# Altium PCB board.PcbDoc
Units mm, origin at the board's own origin, x right, y up, seen from the top; angles counter-clockwise.
Board outline 61 x 96 mm, 2 copper layers (Top Layer, Bottom Layer); 22 components, 98 nets, 207 pads, 43 vias.
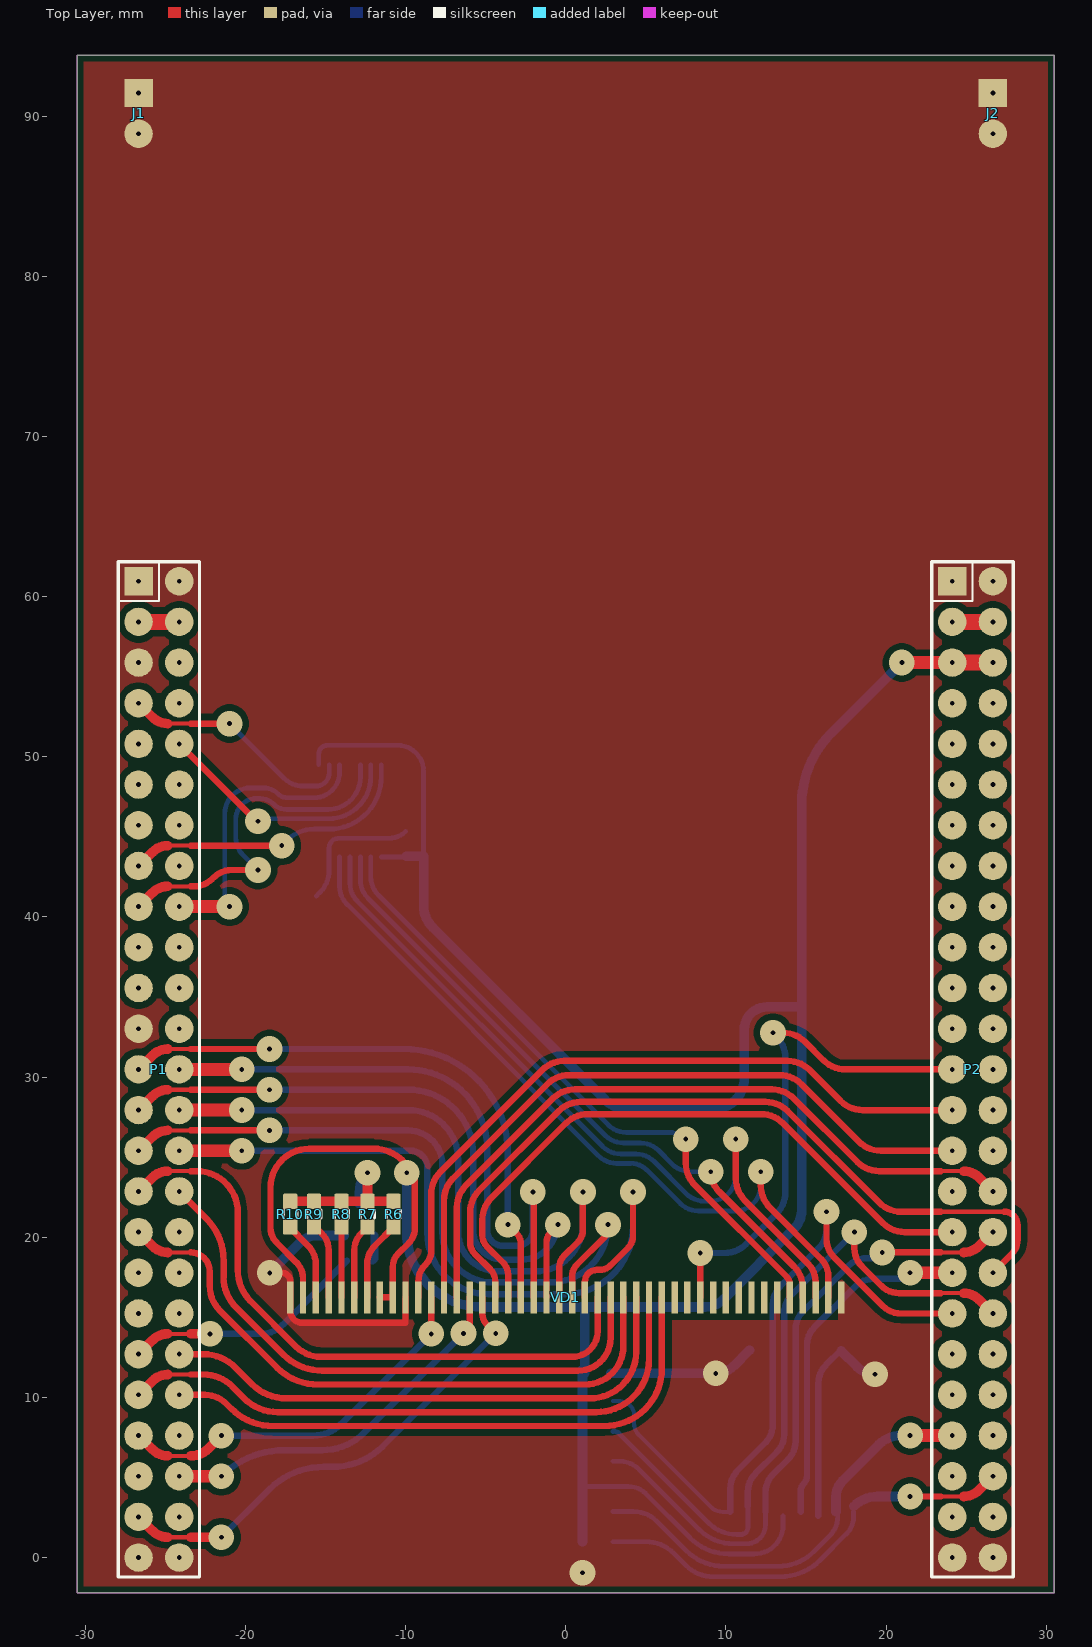
[diagram p0: Top Layer view]
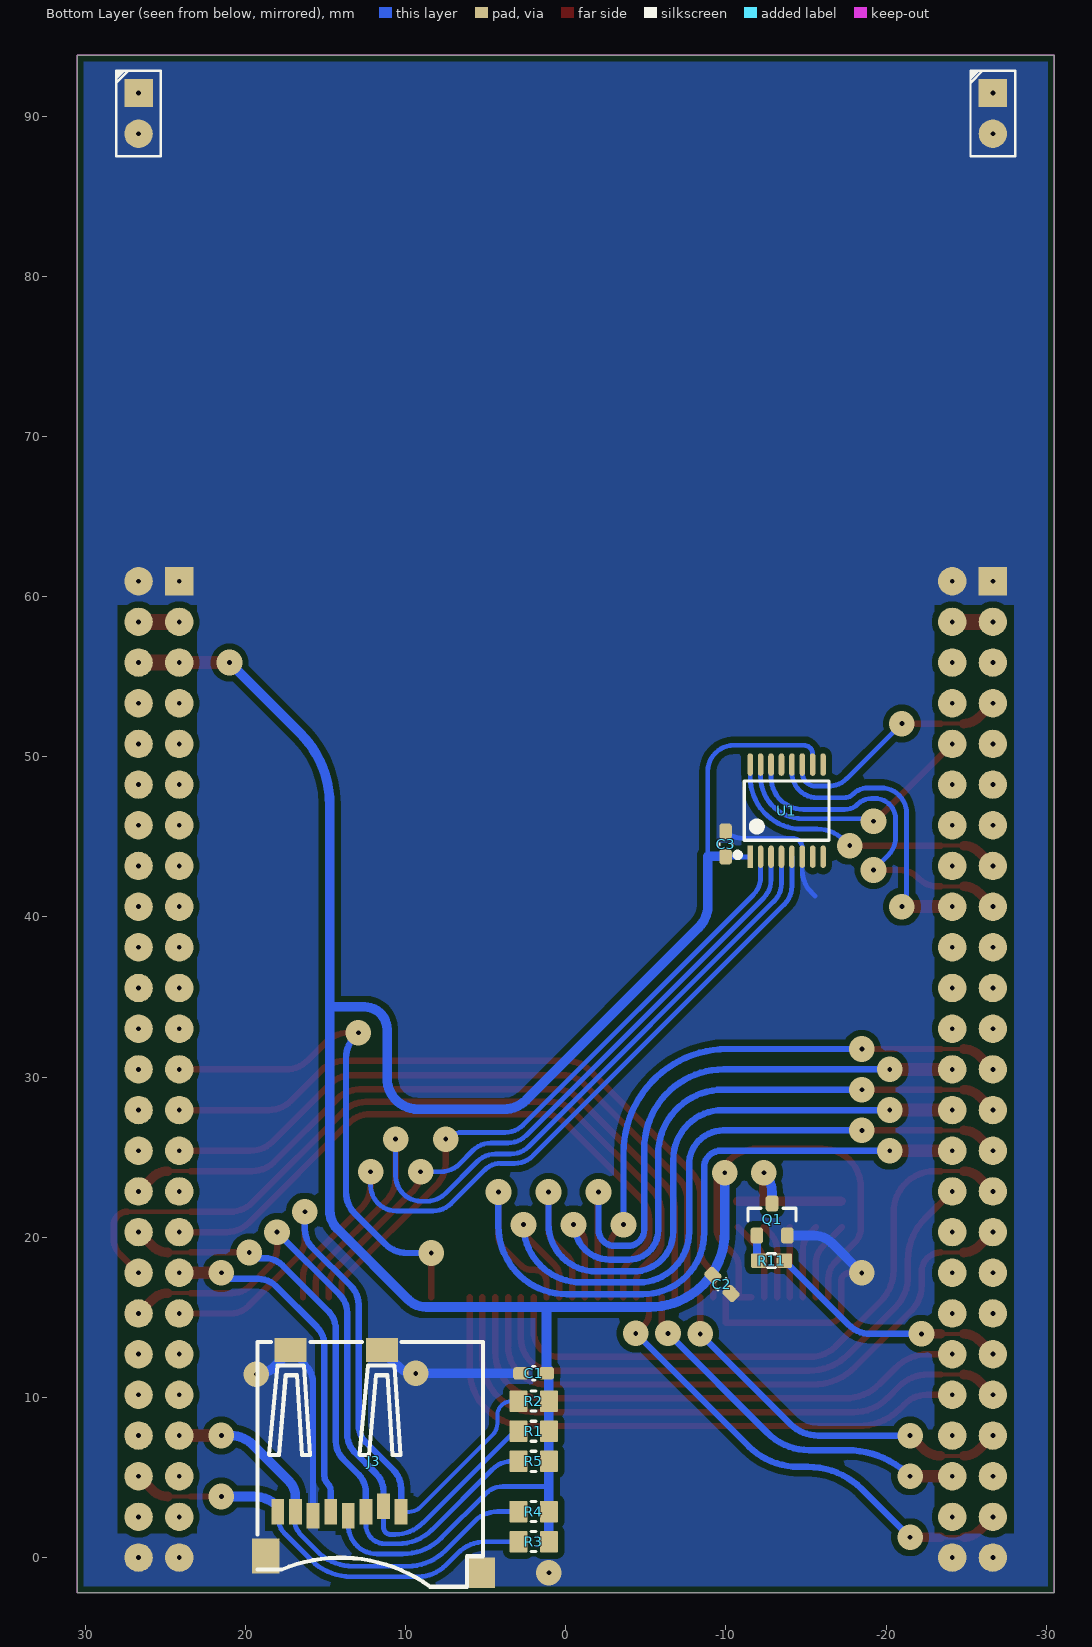
[diagram p1: Bottom Layer view, seen from below]
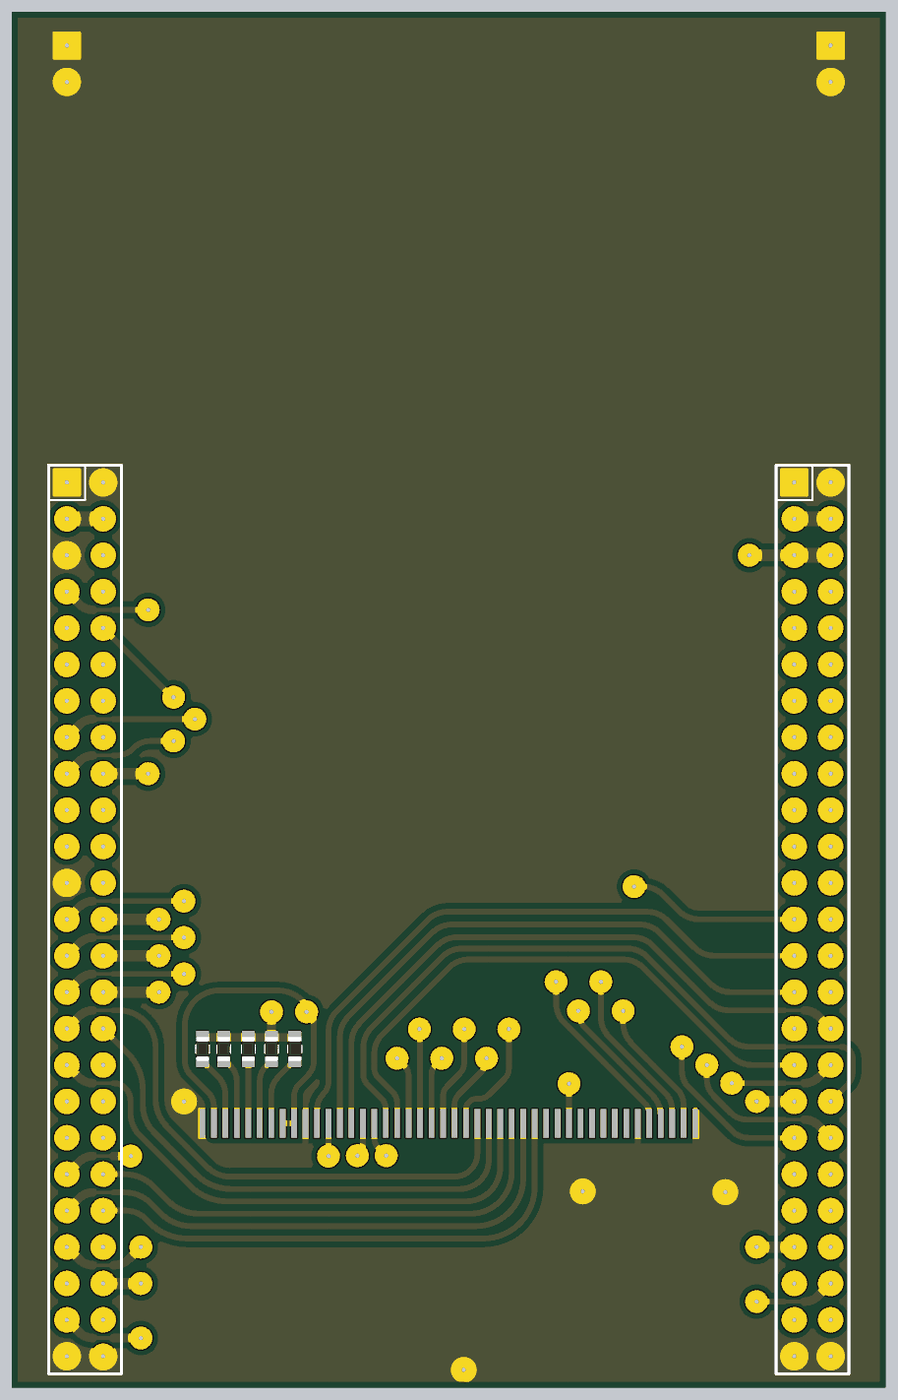
[diagram p2: 3D render of the assembled board from above, using the file's embedded part models]
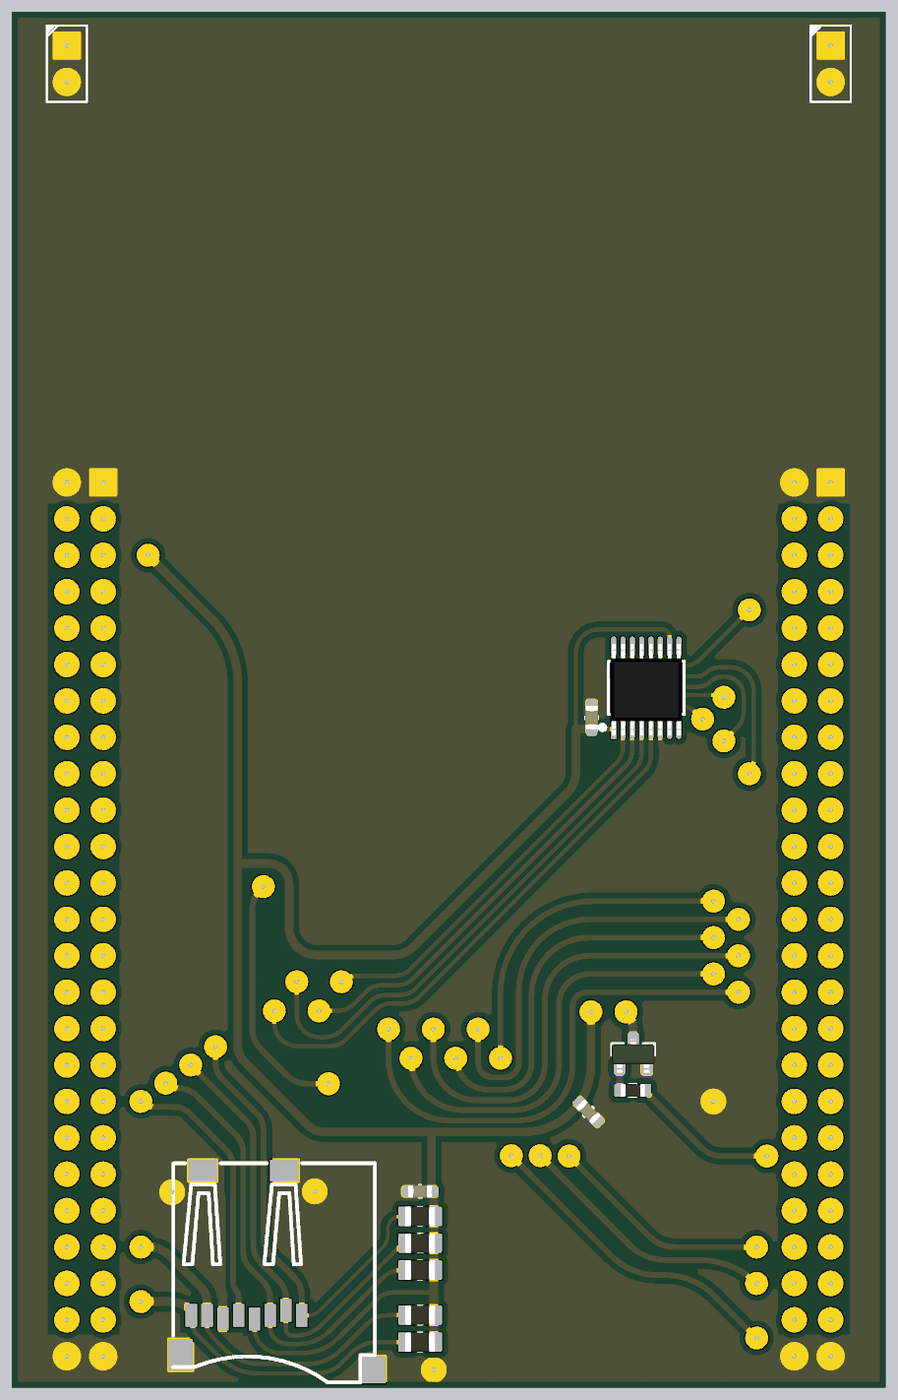
[diagram p3: 3D render of the assembled board from below, using the file's embedded part models]

## Layer stack, top to bottom
Top Solder: solder mask 0.0102, Solder Resist, Dk 3.5
Top Layer: signal copper 0.0356
Dielectric 1: dielectric 0.32, FR-4, Dk 4.8
Bottom Layer: signal copper 0.0356
Bottom Solder: solder mask 0.0102, Solder Resist, Dk 3.5

## Board outline
-30.5,-2.2 30.5,-2.2 30.5,93.8 -30.5,93.8

## Design rules (kind name [scope] priority, off if disabled: settings)
Clearance [All] p1: gap=0.254 ignorepadtopadclearanceinfootprint=FALSE except(0.4: Arc-Fill Arc-Poly Arc-Region Track-Fill Track-Poly Track-Region SMDPad-Fill SMDPad-Poly SMDPad-Region THPad-Fill THPad-Poly THPad-Region Via-Fill Via-Poly Via-Region Fill-Fill Fill-Poly Fill-Region Poly-Poly Poly-Region Region-Region)
PolygonConnect [All] p1: connectstyle=Direct reliefconductorwidth=0.254 reliefentries=4 polygonreliefangle="90 Angle" airgapwidth=0.254
RoutingVias [All] p1: holewidth=0.711 width=1.6 viastyle="Through Hole" minholewidth=0.2 minwidth=1.6 maxholewidth=0.711 maxwidth=2
SolderMaskExpansion [All] p1: expansion=0.102 istentingtop=FALSE
SupplyNets "Schematic Supply Nets_4" [InNet('VDD_2')] p1: voltage=0.000
SupplyNets "Schematic Supply Nets_3" [InNet('GND')] p2: voltage=0.000
SupplyNets "Schematic Supply Nets_2" [InNet('VDD')] p3: voltage=0.000
SupplyNets "Schematic Supply Nets_1" [InNet('5V')] p4: voltage=0.000
SupplyNets "Schematic Supply Nets" [InNet('3V')] p5: voltage=0.000
Width [All] p1: maxlimit=5 minlimit=0.2 preferedwidth=0.3
30 further rules are at their usual default settings.

## Components (designator, comment, footprint, x,y, rotation, side; value= is the part's Value field where it differs from the comment)
C1 "1u" C0603 2,11.5 r180 bottom
C2 "1u" C0603 -9.75,17.057 r45 bottom
C3 "1u" C0603 -9.982,44.548 r270 bottom
J1 "Header 2" HDR_1X2 -26.67,90.17 r180 top
J2 "Header 2" HDR_1X2 26.67,90.17 r180 top
J3 "TF-001B" TF-SMD_TF-001B 12,6 r90 bottom
P1 "Header 25X2" HDR_2X25 -25.4,30.48 r270 top
P2 "Header 25X2" HDR_2X25 25.4,30.48 r270 top
Q1 "2N7002" SOT-23 -12.883,21.107 r270 bottom
R1 "62k" R0805 2,7.887 r0 bottom
R2 "62k" R0805 2,9.762 r0 bottom
R3 "62k" R0805 2,0.992 r0 bottom
R4 "62k" R0805 2,2.867 r0 bottom
R5 "62k" R0805 2,6.012 r0 bottom
R6 "22" R0603 -10.75,21.438 r270 top
R7 "22" R0603 -12.375,21.438 r270 top
R8 "22" R0603 -14,21.438 r270 top
R9 "22" R0603 -15.716,21.438 r270 top
R10 "22" R0603 -17.196,21.438 r270 top
R11 "100" R0603 -12.852,18.542 r0 bottom
U1 "XPT2046" TSSOP-16 -13.795,46.633 r90 bottom
VD1 "R61509" TFT_3.2inch 0,4.5 r0 top

## Footprints (in the part's own frame and the unit in brackets; to place one, negate y for a bottom-side part, rotate by r counter-clockwise, add the part's x,y. Pads: shape width x height; smd on the part's side, far side on the other; paste and mask are expansions set on the pad)
C0603 [mil] "Chip Capacitor"
  rrect50% 38x31 smd mask+1.97: 1(-31.5,0) 2(31.5,0)
  silkscreen extent -3,-17 3,17, body extent -33,-18 33,18, height 35
HDR_1X2 [mil]
  rect 70x70 hole 11.81: 1(0,-50)
  round 70 hole 11.81: 2(0,50)
HDR_2X25 [mil]
  rect 70x70 hole 11.81: 1(-1200,-50)
  round 70 hole 11.81: 2(-1200,50) 3(-1100,-50) 4(-1100,50) 5(-1000,-50) 6(-1000,50) 7(-900,-50) 8(-900,50) 9(-800,-50) 10(-800,50) 11(-700,-50) 12(-700,50) 13(-600,-50) 14(-600,50) 15(-500,-50) 16(-500,50) 17(-400,-50) 18(-400,50) 19(-300,-50) 20(-300,50) 21(-200,-50) 22(-200,50) 23(-100,-50) 24(-100,50) 25(0,-50) 26(0,50) 27(100,-50) 28(100,50) 29(200,-50) 30(200,50) 31(300,-50) 32(300,50) 33(400,-50) 34(400,50) 35(500,-50) 36(500,50) 37(600,-50) 38(600,50) 39(700,-50) 40(700,50) 41(800,-50) 42(800,50) 43(900,-50) 44(900,50) 45(1000,-50) 46(1000,50) 47(1100,-50) 48(1100,50) 49(1200,-50) 50(1200,50)
  silkscreen extent -1248,-101 1248,100
R0603 [mil] "Chip Resistor; Body 1.6 x 0.8 mm (LxW typ)"
  rrect20% 38x35.43 smd mask+1.97: 1(-31.5,0) 2(31.5,0)
  silkscreen extent -10,-17 10,17, body extent -33,-18 33,18, height 22
R0805 [mil] "Chip Resistor; Body 1.6 x 0.8 mm (LxW typ)"
  rrect15% 45x53.15 smd: 1(-37.5,0) 2(37.5,0)
  silkscreen extent -6,-25 6,25, body extent -41,-27 41,27, height 24
SOT-23 [mm]
  rrect50% 1x0.8 smd mask+0.05: 1(1,-0.95) 2(1,0.95) 3(-1,0)
  silkscreen extent -0.7,-1.5 0.1,1.5, body extent -1.27,-1.5 1.33,1.5, height 1.1
TF-SMD_TF-001B [mm]
  rect 1.6x0.8 smd: 1(-3.145,-1.726) 2(-2.8,-0.625) 3(-3.15,0.475) 4(-3.4,1.575) 5(-3.15,2.675) 6(-3.4,3.775) 7(-3.15,4.875) 8(-3.15,5.975)
  rect 2.2x1.7 smd: 9(-5.9,6.725)
  rect 1.9x1.7 smd: 10(-6.95,-6.725)
  rect 1.5x2 smd: 11(6.95,5.175) 12(6.95,-0.525)
  silkscreen extent -7.82,-6.84 7.47,7.26
TFT_3.2inch [mm]
  rect 0.4x2 smd: 1(17.2,11.75) 2(16.4,11.75) 3(15.6,11.75) 4(14.8,11.75) 5(14,11.75) 6(13.2,11.75) 7(12.4,11.75) 8(11.6,11.75) 9(10.8,11.75) 10(10,11.75) 11(9.2,11.75) 12(8.4,11.75) 13(7.6,11.75) 14(6.8,11.75) 15(6,11.75) 16(5.2,11.75) 17(4.4,11.75) 18(3.6,11.75) 19(2.8,11.75) 20(2,11.75) 21(1.2,11.75) 22(0.4,11.75) 23(-0.4,11.75) 24(-1.2,11.75) 25(-2,11.75) 26(-2.8,11.75) 27(-3.6,11.75) 28(-4.4,11.75) 29(-5.2,11.75) 30(-6,11.75) 31(-6.8,11.75) 32(-7.6,11.75) 33(-8.4,11.75) 34(-9.2,11.75) 35(-10,11.75) 36(-10.8,11.75) 37(-11.6,11.75) 38(-12.4,11.75) 39(-13.2,11.75) 40(-14,11.75) 41(-14.8,11.75) 42(-15.6,11.75) 43(-16.4,11.75) 44(-17.2,11.75)
  body extent -24,-1.5 24,81, height 5.8
TSSOP-16 [mm]
  rect 1.4x0.35 smd: 1(-2.875,2.275)
  oval 1.4x0.35 smd: 2(-2.875,1.625) 3(-2.875,0.975) 4(-2.875,0.325) 5(-2.875,-0.325) 6(-2.875,-0.975) 7(-2.875,-1.625) 8(-2.875,-2.275) 9(2.875,-2.275) 10(2.875,-1.625) 11(2.875,-0.975) 12(2.875,-0.325) 13(2.875,0.325) 14(2.875,0.975) 15(2.875,1.625) 16(2.875,2.275)
  silkscreen extent -2.89,-2.65 1.85,3.18, body extent -3.34,-2.5 3.06,2.5, height 1.21

## Part data
C1 C2 C3: library part Cap
J3: JLCPCB Part Class="Extended Part", LCSC Part Name="自弹式 MicroSD卡(TF卡) 卡座", Manufacturer=SOFNG(硕方), Operating Temperature=-35℃~+85℃, Add into BOM=yes, Additional Card Detection Pins=带检测功能, Card Connection Mode=Self-bouncing, Card Type="MicroSD card (TF card)", Connector Type="Card Slot", Convert to PCB=yes, Datasheet=https://atta.szlcsc.com/upload/public/pdf/source/20200911/C125617_63CFE4E7470796235D874E54AE54675D.pdf, Device=TF-001B, Height Above Board=1.85mm, Manufacturer Part=TF-001B, Supplier=LCSC, Supplier Footprint=SMD, Supplier Part=C125617, Symbol=TF-001B
P1 P2: "Header, 25-Pin, Dual row", LatestRevisionDate=17-Jul-2002, LatestRevisionNote="Re-released for DXP Platform.", Publisher="Altium Limited"
R1 R2 R3 R4 R5 R6 R7 R8 R9 R10 R11: library part RES_0402_1K5-1%
U1: library part U?
VD1: library part R61509_TFT

## Via types
v1: diameter 1.6, hole 0.3, Top Layer to Bottom Layer, 43 vias

## Nets (pads, with @x,y where several pads share a name; then routed paths per layer and width w, separated by ;. In a path a pad name is that pad's centre, name@x,y a point inside that pad or via, vN(x,y) a via of type N, cw(c..) or ccw(c..) an arc to the next point about the centre after c; other vN are vias at no path point)
3V: C1.2 C2.2 C3.2 J3.4 P2.5 P2.6 R1.1 R2.1 R3.1 R4.1 R5.1 U1.1 U1.10 VD1.36 VD1.37 VD1.43 | length 187.7
  Top Layer w0.4: VD1.43 -16.4,17.422 ccw(c-17.82,17.422) -16.816,18.427 -18.035,19.646 cw(c-17.083,20.597) -18.429,20.597 -18.429,23.114 cw(c-16.019,23.114) -16.019,25.524 -11.97,25.524 cw(c-11.97,22.984) -10.174,24.781 -9.422,24.028 -9.422,20.56 cw(c-10.734,20.56) -9.806,19.633 -10.456,18.982 ccw(c-9.626,18.152) -10.8,18.152 VD1.36 VD1.37
  Top Layer w0.8: v1(20.992,55.88) P2.5
  Top Layer w1: P2.5 P2.6
  Bottom Layer w0.3: U1.10@-15.417,49.498 -15.417,50.171 cw(c-14.876,50.171) -14.876,50.712 -10.495,50.712 cw(c-10.495,49.092) -8.874,49.092 -8.874,43.776 ; U1.1@-11.517,43.748 C3.2 C3.2@-9.954,43.776 ; 1.048,4.44 3.923,4.44 cw(c3.923,2.931) 4.99,3.998 7.759,1.228 ccw(c10.183,3.652) 10.183,0.224 11.777,0.224 ccw(c11.777,2.022) 13.575,2.022 J3.4
  Bottom Layer w0.6: C3.2@-9.954,43.776 -8.874,43.776 -8.874,40.723 ccw(c-6.919,40.723) -8.302,39.34 2.475,28.564 ccw(c3.858,29.947) 3.858,27.991 9.22,27.991 ccw(c9.22,29.921) 11.151,29.921 11.151,32.969 cw(c12.561,32.969) 12.561,34.38 14.732,34.38 ; v1(-9.93,24.028) -9.93,20.314 ccw(c-5.262,20.314) -5.262,15.646 1.2,15.646 ; R3.1 R4.1 1.048,4.44 R5.1 R1.1 R2.1 C1.2@1.048,11.728 ; C1.2 1.2,15.646 ; v1(20.992,55.88) 16.57,51.458 ccw(c21.006,47.021) 14.732,47.021 14.732,34.38 ; 1.2,15.646 8.71,15.646 ccw(c8.71,17.247) 9.841,16.115 14.263,20.537 ccw(c13.132,21.669) 14.732,21.669 14.732,34.38
5V: P2.3 P2.4 | length 2.5
  Top Layer w1: P2.3 P2.4
BOOT0: P2.21
D0: P1.46 VD1.30 | length 23.5
  Top Layer w0.4: v1(-6.384,13.995) -6,14.379 VD1.30
  Top Layer w0.8: P1.46@-24.13,5.077 v1(-21.5,5.077)
  Bottom Layer w0.4: v1(-21.5,5.077) cw(c-17.567,1.144) -17.567,6.706 -15.192,6.706 ccw(c-15.192,10.373) -12.6,7.779 v1(-6.384,13.995)
D1: P1.47 VD1.29 | length 30.2
  Top Layer w0.254: -24.841,1.27 -23.419,1.27
  Top Layer w0.4: VD1.29 -5.2,15.192 ccw(c-4.32,15.192) -4.942,14.57 v1(-4.367,13.995)
  Top Layer w0.6: P1.47 -25.795,1.665 ccw(c-24.841,2.619) -24.841,1.27 ; -23.419,1.27 v1(-21.5,1.27)
  Bottom Layer w0.4: v1(-21.5,1.27) -18.515,4.255 cw(c-15.112,0.851) -15.112,5.664 -14.552,5.664 ccw(c-14.552,10.14) -11.388,6.974 v1(-4.367,13.995)
D2: P2.36 VD1.28 | length 49.9
  Top Layer w0.254: 23.419,21.59 27.381,21.59
  Top Layer w0.4: VD1.28 -4.4,17.263 ccw(c-5.416,17.263) -4.698,17.982 -5.671,18.956 cw(c-4.953,19.674) -5.969,19.674 -5.969,21.542 cw(c-4.013,21.542) -5.396,22.925 -0.446,27.875 cw(c0.937,26.492) 0.937,28.448 12.474,28.448 cw(c12.474,26.492) 13.857,27.875 19.569,22.163 ccw(c20.952,23.546) 20.952,21.59 23.419,21.59 ; P2.36 27.842,18.952 ccw(c26.932,19.863) 28.219,19.863 28.219,20.752 ccw(c27.381,20.752) 27.381,21.59
D3: P2.33 VD1.27 | length 40.7
  Top Layer w0.4: VD1.27 -3.6,17.683 ccw(c-4.616,17.683) -3.898,18.401 -4.909,19.413 cw(c-4.191,20.131) -5.207,20.131 -5.207,21.085 cw(c-3.251,21.085) -4.634,22.468 0.011,27.113 cw(c1.394,25.73) 1.394,27.686 12.186,27.686 cw(c12.186,25.73) 13.569,27.113 19.79,20.893 ccw(c21.172,22.276) 19.791,20.892 ccw(c21.172,22.276) 21.172,20.32 P2.33
D4: P1.25 VD1.26 | length 36.5
  Top Layer w0.254: -24.841,31.75 -23.419,31.75
  Top Layer w0.4: -23.419,31.75 v1(-18.491,31.75) ; v1(-3.61,20.791) -3.098,20.278 cw(c-3.816,19.56) -2.8,19.56 VD1.26
  Top Layer w0.6: P1.25 -25.795,31.355 cw(c-24.841,30.401) -24.841,31.75
  Bottom Layer w0.4: v1(-18.491,31.75) -10.096,31.75 cw(c-10.096,25.264) -3.61,25.264 v1(-3.61,20.791)
D5: P1.26 VD1.25 | length 40.1
  Top Layer w0.4: v1(-2.048,22.823) cw(c-2.164,22.706) -2,22.706 VD1.25
  Top Layer w0.8: P1.26 v1(-20.23,30.48)
  Bottom Layer w0.4: v1(-20.23,30.48) -9.867,30.48 cw(c-9.867,25.516) -4.902,25.516 -4.902,20.472 ccw(c-3.886,20.472) -3.886,19.456 -3.064,19.456 ccw(c-3.064,20.472) -2.048,20.472 v1(-2.048,22.823)
D6: P1.27 VD1.24 | length 40.8
  Top Layer w0.254: -24.841,29.21 -23.419,29.21
  Top Layer w0.4: -23.419,29.21 v1(-18.491,29.21) ; VD1.24 -1.2,19.656 cw(c-0.184,19.656) -0.902,20.374 v1(-0.486,20.791)
  Top Layer w0.6: P1.27 -25.795,28.815 cw(c-24.841,27.861) -24.841,29.21
  Bottom Layer w0.4: v1(-18.491,29.21) -9.806,29.21 cw(c-9.806,25.177) -5.773,25.177 -5.773,20.433 ccw(c-3.941,20.433) -3.941,18.601 -2.742,18.601 ccw(c-2.742,20.791) -0.552,20.791 v1(-0.486,20.791)
D7: P1.28 VD1.23 | length 43.7
  Top Layer w0.4: VD1.23 -0.4,18.128 cw(c0.616,18.128) -0.102,18.846 0.778,19.727 ccw(c0.06,20.445) 1.076,20.445 v1(1.076,22.823)
  Top Layer w0.8: P1.28 v1(-20.23,27.94)
  Bottom Layer w0.4: v1(-20.23,27.94) -9.81,27.94 cw(c-9.81,24.843) -6.713,24.843 -6.713,20.352 ccw(c-4.225,20.352) -4.225,17.864 -1.902,17.864 ccw(c-1.902,20.842) 1.076,20.842 v1(1.076,22.823)
D8: P1.29 VD1.22 | length 44.4
  Top Layer w0.254: -24.841,26.67 -23.419,26.67
  Top Layer w0.4: -23.419,26.67 v1(-18.491,26.67) ; VD1.22 0.4,17.556 cw(c1.416,17.556) 0.698,18.274 2.34,19.917 ccw(c1.622,20.636) 2.638,20.636 v1(2.638,20.791)
  Top Layer w0.6: P1.29 -25.795,26.275 cw(c-24.841,25.321) -24.841,26.67
  Bottom Layer w0.4: v1(-18.491,26.67) -9.84,26.67 cw(c-9.84,24.533) -7.703,24.533 -7.703,20.33 ccw(c-4.552,20.33) -4.552,17.178 -0.974,17.178 ccw(c-0.974,20.791) v1(2.638,20.791)
D9: P1.30 VD1.21 | length 47.9
  Top Layer w0.4: VD1.21 1.2,17.227 cw(c1.93,17.227) 1.93,17.958 2.094,17.958 ccw(c2.094,18.974) 2.812,18.255 3.902,19.345 ccw(c3.184,20.064) 4.2,20.064 v1(4.2,22.823)
  Top Layer w0.8: P1.30 v1(-20.23,25.4)
  Bottom Layer w0.4: v1(-20.23,25.4) -9.676,25.4 cw(c-9.676,24.367) -8.643,24.367 -8.643,20.265 ccw(c-4.82,20.265) -4.82,16.442 -0.057,16.442 ccw(c-0.057,20.699) 4.2,20.699 v1(4.2,22.823)
D10: P1.31 VD1.20 | length 40
  Top Layer w0.254: -24.841,24.13 -23.419,24.13
  Top Layer w0.4: -23.419,24.13 -23.039,24.13 cw(c-23.039,21.564) -20.472,21.564 -20.472,17.943 ccw(c-17.729,17.943) -19.669,16.003 -16.849,13.183 ccw(c-15.271,14.761) -15.271,12.529 0.4,12.529 ccw(c0.4,14.129) 2,14.129 VD1.20
  Top Layer w0.6: P1.31 -25.795,23.735 cw(c-24.841,22.781) -24.841,24.13
D11: P1.32 VD1.19 | length 37
  Top Layer w0.4: P1.32 -22.436,21.166 cw(c-25.027,18.575) -21.363,18.575 -21.363,17.499 ccw(c-18.723,17.499) -20.59,15.633 -17.632,12.674 ccw(c-15.198,15.108) -15.198,11.666 0.766,11.666 ccw(c0.766,13.701) 2.8,13.701 VD1.19
D12: P1.33 VD1.18 | length 39.6
  Top Layer w0.254: -24.841,19.05 -23.419,19.05
  Top Layer w0.4: -23.419,19.05 cw(c-23.419,17.856) -22.225,17.856 -22.225,16.966 ccw(c-20.022,16.965) -21.58,15.408 -18.047,11.875 ccw(c-15.46,14.462) -15.46,10.803 1.193,10.803 ccw(c1.193,13.21) 3.6,13.21 VD1.18
  Top Layer w0.6: P1.33 -25.795,19.445 ccw(c-24.841,20.399) -24.841,19.05
D13: P1.40 VD1.17 | length 34.5
  Top Layer w0.4: P1.40 -22.641,12.7 cw(c-22.641,9.849) -20.625,11.865 -19.592,10.832 ccw(c-17.44,12.985) -17.44,9.941 1.506,9.941 ccw(c1.506,12.834) 4.4,12.834 VD1.17
D14: P1.41 VD1.16 | length 38.8
  Top Layer w0.254: -24.841,11.43 -23.419,11.43
  Top Layer w0.4: -23.419,11.43 -22.609,11.43 cw(c-22.609,8.918) -20.833,10.694 -20.09,9.951 ccw(c-17.982,12.059) -17.982,9.078 1.896,9.078 ccw(c1.896,12.382) 5.2,12.382 VD1.16
  Top Layer w0.6: P1.41 -25.795,11.035 cw(c-24.841,10.081) -24.841,11.43
D15: P1.42 VD1.15 | length 37.2
  Top Layer w0.4: P1.42 -22.534,10.16 cw(c-22.534,8.256) -21.188,9.602 -20.884,9.299 ccw(c-18.268,11.915) -18.268,8.215 2.42,8.215 ccw(c2.42,11.795) 6,11.795 VD1.15
D_CS: P2.27 VD1.34 | length 44
  Top Layer w0.4: VD1.34 -9.2,17.233 cw(c-7.708,17.233) -8.763,18.288 ccw(c-9.65,19.175) -8.396,19.175 -8.396,22.697 cw(c-6.44,22.697) -7.823,24.08 -1.462,30.441 cw(c-0.079,29.058) -0.079,31.013 13.846,31.013 cw(c13.846,29.058) 15.229,30.441 17.156,28.513 ccw(c18.539,29.896) 18.539,27.94 P2.27
D_RD: P2.32 VD1.31 | length 44.9
  Top Layer w0.254: 23.419,24.13 24.841,24.13
  Top Layer w0.4: VD1.31 -6.8,21.854 cw(c-4.844,21.854) -6.227,23.237 -0.801,28.663 cw(c0.582,27.28) 0.582,29.235 12.855,29.235 cw(c12.855,27.28) 14.238,28.663 18.198,24.703 ccw(c19.581,26.086) 19.581,24.13 23.419,24.13
  Top Layer w0.6: 24.841,24.13 cw(c24.841,22.781) 25.795,23.735 P2.32
D_RS: P1.43 VD1.33 | length 24
  Top Layer w0.254: -24.841,6.35 -23.419,6.35
  Top Layer w0.4: v1(-8.4,13.963) VD1.33
  Top Layer w0.6: P1.43 -25.795,6.745 ccw(c-24.841,7.699) -24.841,6.35 ; -23.419,6.35 ccw(c-23.419,7.925) -22.305,6.811 v1(-21.5,7.617)
  Bottom Layer w0.4: v1(-21.5,7.617) -15.757,7.617 ccw(c-15.757,10.055) -14.032,8.331 v1(-8.4,13.963)
D_WR: P2.29 VD1.32 | length 43.1
  Top Layer w0.4: VD1.32 -7.6,22.299 cw(c-5.644,22.299) -7.027,23.681 -1.157,29.552 cw(c0.226,28.169) 0.226,30.124 13.338,30.124 cw(c13.338,28.169) 14.721,29.552 18.299,25.973 ccw(c19.682,27.356) 19.682,25.4 P2.29
GND: C1.1 C2.1 C3.1 J1.1 J1.2 J2.1 J2.2 J3.6 J3.9 J3.10 J3.11 J3.12 P1.1 P1.2 P1.5 P1.23 P1.49 P1.50 P2.1 P2.2 P2.49 P2.50 Q1.2 U1.6 VD1.1 VD1.6 VD1.35 VD1.44 | length 49.4
  Top Layer w0.4: v1(-18.483,17.774) -17.708,17.774 cw(c-17.708,17.266) -17.2,17.266 VD1.44 -17.2,15.408 ccw(c-16.448,15.408) -16.448,14.656 -10,14.656 VD1.35
  Bottom Layer w0.3: -15.57,41.3 -15.343,41.528 ccw(c-16.726,42.911) -14.77,42.911 U1.6 -14.77,44.311 cw(c-14.173,44.311) -14.173,44.907 -11.046,44.907 ccw(c-11.046,46.412) C3.1
  Bottom Layer w0.4: J3.6 15.775,10.887 cw(c17.375,10.887) 16.244,12.019 J3.11
  Bottom Layer w0.6: v1(-18.483,17.774) -16.618,19.639 cw(c-15.486,18.507) -15.486,20.107 Q1.2 ; C1.1 v1(9.362,11.5) ccw(c9.362,13.1) 10.494,11.969 J3.12 ; J3.11@17.2,12.9 18.181,11.919 ccw(c19.313,13.05) v1(19.313,11.45)
  other v1: 1.048,-0.95
NetQ1_1: Q1.1 R11.2 | length 1.6
  Bottom Layer w0.5: R11.2 -11.933,18.661 Q1.1
NetQ1_3: Q1.3 R6.1 R7.1 R8.1 R9.1 R10.1 | length 10.3
  Top Layer w0.6: R10.1 R9.1 R8.1 R7.1 ; v1@-12.375,23.997 R7.1 ; R6.1 R7.1
  Bottom Layer w0.6: Q1.3 -12.883,22.802 cw(c-11.149,22.802) v1(-12.375,24.028)
NetR6_2: R6.2 VD1.38 | length 5
  Top Layer w0.4: VD1.38 -12.4,18.299 cw(c-10.738,18.299) -11.913,19.474 R6.2
NetR7_2: R7.2 VD1.39 | length 4.7
  Top Layer w0.4: VD1.39 -13.2,19.197 cw(c-11.715,19.197) -12.765,20.248 R7.2
NetR8_2: R8.2 VD1.40 | length 4.4
  Top Layer w0.4: VD1.40 R8.2
NetR9_2: R9.2 VD1.41 | length 4.7
  Top Layer w0.4: R9.2@-15.625,20.637 -15.235,20.248 cw(c-16.285,19.197) -14.8,19.197 VD1.41
NetR10_2: R10.2 VD1.42 | length 5
  Top Layer w0.4: R10.2@-17.25,20.637 -16.087,19.474 cw(c-17.262,18.299) -15.6,18.299 VD1.42
NRST: P1.6
PA0: P1.12
PA1: P1.11
PA2: P1.14
PA3: P1.13
PA4: P1.16
PA5: P1.15 U1.16 | length 18.6
  Top Layer w0.254: -24.841,44.45 -23.419,44.45
  Top Layer w0.4: -23.419,44.45 v1(-17.729,44.45)
  Top Layer w0.6: P1.15 -25.795,44.055 cw(c-24.841,43.101) -24.841,44.45
  Bottom Layer w0.3: v1(-17.729,44.45) -17.405,44.775 cw(c-15.697,43.067) -15.697,45.482 -14.765,45.482 ccw(c-14.765,48.73) -11.517,48.73 U1.16@-11.517,49.498
PA6: P1.18 U1.12 | length 18.9
  Top Layer w0.8: P1.18 v1(-20.992,40.64) v1@-20.828,40.64
  Bottom Layer w0.3: v1(-20.992,40.64) -21.285,40.933 -21.285,46.457 cw(c-19.685,46.457) -19.685,48.057 -18.878,48.057 cw(c-18.878,46.756) -17.958,47.676 ccw(c-17.377,48.257) -17.377,47.435 -15.717,47.435 ccw(c-15.717,49.035) -14.117,49.035 U1.12@-14.117,49.498
PA7: P1.17 U1.14 | length 22.5
  Top Layer w0.254: -24.841,41.91 -23.419,41.91
  Top Layer w0.4: -23.419,41.91 -23.193,41.91 ccw(c-23.193,43.51) -22.061,42.379 -21.982,42.457 cw(c-20.851,41.326) -20.851,42.926 v1(-19.214,42.926)
  Top Layer w0.6: P1.17 -25.795,41.515 cw(c-24.841,40.561) -24.841,41.91
  Bottom Layer w0.3: v1(-19.214,42.926) -20.131,43.843 cw(c-18.999,44.974) -20.599,44.974 -20.599,46.101 cw(c-19.304,46.101) -19.304,47.396 -19.096,47.396 cw(c-19.096,46.182) -18.237,47.041 ccw(c-17.426,47.852) -17.426,46.705 -14.85,46.705 ccw(c-14.85,48.738) -12.817,48.738 U1.14@-12.817,49.498
PA8: J3.7 P2.43 R4.2 | length 27
  Top Layer w0.8: v1(21.5,7.62) P2.43
  Bottom Layer w0.3: R4.2 4.251,2.867 cw(c4.251,0.841) 5.684,2.274 7.529,0.429 ccw(c9.861,2.761) 9.861,-0.538 13.278,-0.538 ccw(c13.278,2.635) 15.522,0.392 16.482,1.352 ccw(c15.259,2.575) 16.989,2.575 J3.7
  Bottom Layer w0.6: J3.7 16.875,3.802 cw(c18.266,3.802) 17.282,4.786 19.553,7.056 cw(c20.915,5.693) 20.915,7.62 v1(21.5,7.62)
PA9: P2.44
PA10: P2.41
PA13: P2.42
PA14: P2.39
PA15: P2.40
PB0: P1.22
PB1: P1.21
PB2: P1.24
PB3: P2.28
PB4: P2.25 VD1.12 | length 32.1
  Top Layer w0.4: VD1.12 v1(8.4,19.013) ; v1(12.943,32.766) 13.566,32.766 cw(c13.566,30.81) 14.949,32.193 16.09,31.053 ccw(c17.473,32.436) 17.473,30.48 P2.25
  Bottom Layer w0.4: v1(8.4,19.013) 9.897,19.013 ccw(c9.897,20.968) 11.28,19.585 13.143,21.449 ccw(c11.76,22.832) 13.716,22.832 13.716,31.183 ccw(c11.76,31.183) 13.143,32.566 v1(12.943,32.766)
PB5: P2.26
PB6: P2.23
PB7: P2.24
PB8: P2.19
PB9: P2.20
PB10: P1.34
PB11: P1.35
PB12: P1.36
PB13: P1.37
PB14: P1.38
PB15: P1.39 R11.1 | length 15.3
  Top Layer w0.254: -24.841,13.97 -23.419,13.97
  Top Layer w0.6: P1.39 -25.795,13.575 cw(c-24.841,12.621) -24.841,13.97 ; -23.419,13.97 -22.215,13.97 v1(-22.211,13.967)
  Bottom Layer w0.4: v1(-22.211,13.967) -19.038,13.967 ccw(c-19.038,15.922) -17.655,14.539 R11.1
PC0: P1.8
PC1: P1.7 U1.11 | length 14.9
  Top Layer w0.254: -24.841,52.07 -23.419,52.07
  Top Layer w0.4: -23.419,52.07 v1(-20.992,52.07)
  Top Layer w0.6: P1.7 -25.795,52.465 ccw(c-24.841,53.419) -24.841,52.07
  Bottom Layer w0.3: v1(-20.992,52.07) -17.557,48.635 ccw(c-16.425,49.766) -16.88,48.232 ccw(c-16.425,49.766) -16.425,48.166 -15.596,48.166 ccw(c-15.596,48.994) -14.767,48.994 U1.11@-14.767,49.498
PC2: P1.10 U1.15 | length 16.3
  Top Layer w0.4: P1.10 -19.368,46.038 ccw(c-19.214,46.191) v1(-19.214,45.974)
  Bottom Layer w0.3: v1(-19.214,45.974) -19.059,46.129 -14.806,46.129 ccw(c-14.806,48.768) -12.167,48.768 U1.15@-12.167,49.498
PC3: P1.9
PC4: P1.20
PC5: P1.19
PC6: P2.47
PC7: P2.48
PC8: P2.45
PC9: J3.8 P2.46 R3.2 | length 27.4
  Top Layer w0.254: 23.419,3.81 24.841,3.81
  Top Layer w0.4: v1(21.5,3.81) 23.419,3.81
  Top Layer w0.6: 24.841,3.81 ccw(c24.841,5.159) 25.795,4.205 P2.46
  Bottom Layer w0.254: J3.8 J3.8@17.975,3.192
  Bottom Layer w0.3: R3.2 5.008,0.992 cw(c5.008,-1.446) 6.733,0.278 7.49,-0.48 ccw(c9.214,1.245) 9.214,-1.194 13.386,-1.194 ccw(c13.386,2.361) 15.9,-0.152 17.526,1.473 ccw(c16.442,2.557) 17.975,2.557 J3.8
  Bottom Layer w0.6: J3.8@17.975,3.192 cw(c19.467,1.7) 19.467,3.81 v1(21.5,3.81)
PC10: J3.1 P2.37 R2.2 | length 43.5
  Top Layer w0.4: v1(16.284,21.59) 16.284,19.888 ccw(c17.884,19.888) 16.752,18.757 19.801,15.709 ccw(c20.932,16.84) 20.932,15.24 P2.37
  Bottom Layer w0.254: R2.2 3.395,9.762 cw(c3.395,8.89) 4.267,8.89 4.267,8.371 ccw(c5.283,8.371) 4.565,7.653 9.065,3.153 ccw(c9.783,3.871) 9.783,2.855 J3.1
  Bottom Layer w0.4: J3.1 10.274,4.314 cw(c11.875,4.314) 10.743,5.445 12.462,7.164 ccw(c11.33,8.296) 12.931,8.296 12.931,15.798 cw(c14.531,15.798) 13.399,16.93 15.815,19.346 ccw(c14.683,20.477) 16.284,20.477 v1(16.284,21.59)
PC11: J3.2 P2.38 R1.2 | length 43.7
  Top Layer w0.254: 23.419,16.51 24.841,16.51
  Top Layer w0.4: v1(18.022,20.32) 18.022,19.31 ccw(c19.623,19.31) 18.491,18.179 19.691,16.979 ccw(c20.823,18.11) 20.823,16.51 23.419,16.51
  Top Layer w0.6: 24.841,16.51 cw(c24.841,15.161) 25.795,16.115 P2.38
  Bottom Layer w0.3: R1.2@2.953,7.88 cw(c3.009,7.404) 3.348,7.743 8.938,2.152 ccw(c10.655,3.869) 10.655,1.441 10.938,1.441 ccw(c10.938,1.878) 11.375,1.878 J3.2
  Bottom Layer w0.4: J3.2 11.375,4.113 cw(c12.975,4.113) 11.844,5.245 13.173,6.574 ccw(c12.042,7.706) 13.642,7.706 13.642,15.277 cw(c15.242,15.277) 14.111,16.408 v1(18.022,20.32)
PC12: J3.5 P2.35 | length 21.7
  Top Layer w0.8: v1(21.5,17.78) P2.35
  Bottom Layer w0.4: J3.5 14.675,4.154 cw(c15.34,4.154) 14.87,4.624 ; 14.87,4.625 ccw(c14.399,5.095) 15.065,5.095 15.065,13.259 cw(c16.665,13.259) 15.533,14.39 18.07,16.927 cw(c19.202,15.796) 19.202,17.396 21.116,17.396 v1(21.5,17.78)
PC13: P2.12
PC14: P2.9
PC15: P2.10
PD2: J3.3 P2.34 R5.2 | length 40
  Top Layer w0.254: 23.419,19.05 24.841,19.05
  Top Layer w0.4: v1(19.761,19.05) 23.419,19.05
  Top Layer w0.6: 24.841,19.05 ccw(c24.841,20.399) 25.795,19.445 P2.34
  Bottom Layer w0.3: R5.2 3.367,6.012 cw(c3.367,4.307) 4.572,5.513 8.338,1.746 ccw(c10.486,3.895) 10.486,0.857 11.274,0.857 ccw(c11.274,2.057) 12.475,2.057 J3.3
  Bottom Layer w0.4: J3.3 12.475,4.061 cw(c14.075,4.061) 12.944,5.192 13.885,6.133 ccw(c12.753,7.265) 14.353,7.265 14.353,14.249 cw(c15.954,14.249) 14.822,15.381 17.667,18.226 cw(c18.799,17.095) 18.799,18.695 19.406,18.695 v1(19.761,19.05)
PD3: P2.31
PD6: P2.30
PD12: P1.44
PD13: P1.45
PE0: P2.17
PE1: P2.18
PE2: P2.15
PE3: P2.16
PE4: P2.13
PE5: P2.14
PE6: P2.11
PH0: P2.7
PH1: P2.8
VDD: P1.3 P1.4 | length 2.5
  Top Layer w1: P1.3 P1.4
VDD_2: P2.22
Xn: U1.4 VD1.3 | length 49.1
  Top Layer w0.4: v1(10.619,26.125) 10.619,23.668 ccw(c12.575,23.668) 11.192,22.285 15.131,18.346 cw(c14,17.214) 15.6,17.214 VD1.3
  Bottom Layer w0.3: U1.4 -13.47,42.098 ccw(c-11.87,42.098) -13.001,40.967 2.3,25.665 ccw(c3.431,26.797) 3.431,25.197 4.392,25.197 cw(c4.392,23.597) 5.523,24.728 7.532,22.719 ccw(c8.664,23.851) 8.664,22.25 9.019,22.25 ccw(c9.019,23.851) 10.619,23.851 v1(10.619,26.125)
Xp: U1.2 VD1.5 | length 40.3
  Top Layer w0.4: v1(7.495,26.125) 7.495,24.633 ccw(c9.451,24.633) 8.068,23.25 13.792,17.526 cw(c13.291,17.024) 14,17.024 VD1.5
  Bottom Layer w0.3: U1.2 -12.17,42.5 ccw(c-10.57,42.5) -11.701,41.368 2.656,27.012 ccw(c3.787,28.143) 3.787,26.543 6.485,26.543 cw(c6.485,25.114) v1(7.495,26.125)
Yn: U1.5 VD1.2 | length 47.9
  Top Layer w0.4: v1(12.181,24.093) 12.181,23.224 ccw(c14.137,23.224) 12.754,21.841 15.931,18.664 cw(c14.8,17.532) 16.4,17.532 VD1.2
  Bottom Layer w0.3: U1.5 -14.12,41.91 ccw(c-12.52,41.91) -13.651,40.778 2.046,25.081 ccw(c3.177,26.213) 3.177,24.613 4.064,24.613 cw(c4.064,23.202) 5.061,24.2 7.151,22.109 ccw(c8.283,23.241) 8.283,21.641 10.581,21.641 ccw(c10.581,23.241) 12.181,23.241 v1(12.181,24.093)
Yp: U1.3 VD1.4 | length 41
  Top Layer w0.4: v1(9.057,24.093) ccw(c10.814,24.093) 9.572,22.85 14.251,18.171 cw(c12.926,16.846) 14.8,16.846 VD1.4
  Bottom Layer w0.3: U1.3 -12.82,42.312 ccw(c-11.22,42.312) -12.351,41.18 2.478,26.351 ccw(c3.609,27.483) 3.609,25.883 4.671,25.883 cw(c4.671,24.282) 5.803,25.414 6.655,24.561 ccw(c7.787,25.693) 7.787,24.093 v1(9.057,24.093)
pads on no net: P1.48 U1.7 U1.8 U1.9 U1.13 VD1.7 VD1.8 VD1.9 VD1.10 VD1.11 VD1.13 VD1.14

## Polygon pours and split planes (outlines as drawn)
GND on Bottom Layer "GND_L02_P000" (solid, remove dead copper, pour order 0): -30.5,-2.2 -30.5,93.8 30.5,93.8 30.5,-2.2
GND on Top Layer "GND_L01_P001" (solid, remove dead copper, pour order 1): 30.5,-2.2 30.5,93.8 -30.5,93.8 -30.5,-2.2

## Keep-outs
Keep-Out Layer:
  the board outline again, w0.01

## Other copper
Bottom Layer:
  pour cut-out: -23,1.5 -28,1.5 -28,59.5 -23,59.5
  pour cut-out: 23,1.5 28,1.5 28,59.5 23,59.5

## Silkscreen, mask and mechanical layers (free items; w line width, h text height)
Mechanical 1:
  lines w0.01: -30.5,-2.22 -30.5,93.78 30.5,93.78 30.5,-2.22 -30.5,-2.22